# Altium PCB LPEDT_revA1_BikeIt.PcbDoc (part 3 of 3)
Units mil, origin at the board's own origin, x right, y up, seen from the top; angles counter-clockwise.
Board outline 2400 x 2400 mil, 2 copper layers (Top Layer, Bottom Layer), stack 61.756 mil thick; 103 components, 74 nets, 422 pads, 0 vias.
Unrouted connection lines stored in the file: 270.
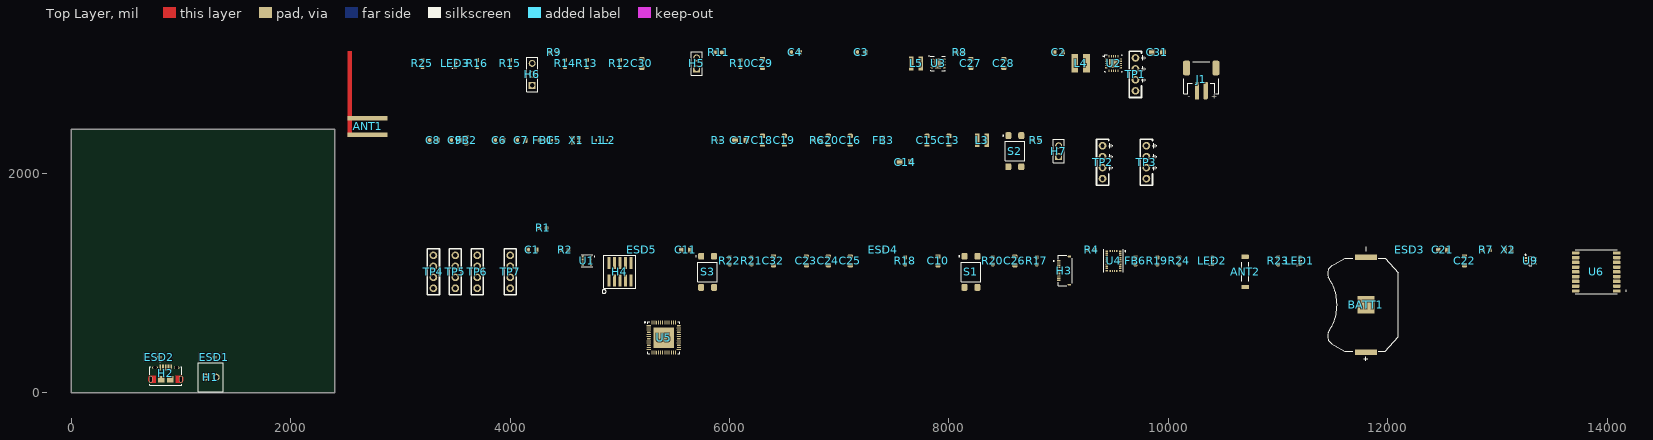
[diagram p0: Top Layer view]

## Part data (continued)
R15: library part CRCW06037M50FKEA, "RES SMD 7.5M 1% 1/10W 0603", Case Code (Imperial)=0603, Case Code (Metric)=1608, Manufacturer=Vishay, Max Operating Temperature=155°C, Max Power Dissipation=100mW, Min Operating Temperature=-55°C, Package Quantity=10, Resistance=7.5MR, Resistance Tolerance=1%, Resistor Type="Thick Film", Supplier Part Number 1=541-7.50MHCT-ND, Temperature Coefficient=100ppm/°C, Voltage Rating=75V, Case/Package=0603, Category="Chip SMD Resistors", ComponentLink1Description=https://datasheet.ciiva.com/2494/dcrcwe3-2494736.pdf?src-supplier=Digi-Key, ComponentLink1URL=https://datasheet.ciiva.com/2494/dcrcwe3-2494736.pdf?src-supplier=Digi-Key, ComponentLink2Description=https://datasheet.ciiva.com/2494/dcrcwe3-2494737.pdf?src-supplier=Digi-Key, ComponentLink2URL=https://datasheet.ciiva.com/2494/dcrcwe3-2494737.pdf?src-supplier=Digi-Key, ComponentLink3Description=https://datasheet.ciiva.com/5552/dcrcwe3-109170-5552646.pdf?src-supplier=Mouser, ComponentLink3URL=https://datasheet.ciiva.com/5552/dcrcwe3-109170-5552646.pdf?src-supplier=Mouser, ComponentLink4Description=https://datasheet.ciiva.com/22869/70201119-22869559.pdf?src-supplier=Allied+Electronics, ComponentLink4URL=https://datasheet.ciiva.com/22869/70201119-22869559.pdf?src-supplier=Allied+Electronics, ComponentLink5Description=https://datasheet.ciiva.com/16784/70201119-16784828.pdf?src-supplier=Allied+Electronics, ComponentLink5URL=https://datasheet.ciiva.com/16784/70201119-16784828.pdf?src-supplier=Allied+Electronics, ComponentLink6Description=https://datasheet.ciiva.com/2494/dcrcwe3-2494735.pdf?src-supplier=Digi-Key, ComponentLink6URL=https://datasheet.ciiva.com/2494/dcrcwe3-2494735.pdf?src-supplier=Digi-Key, ComponentLink7Description=https://datasheet.ciiva.com/22704/1697337-22704015.pdf?src-supplier=Element14, ComponentLink7URL=https://datasheet.ciiva.com/22704/1697337-22704015.pdf?src-supplier=Element14, Construction=Rectangular, Contact Plating=Tin, Depth=0.85mm, Features="Automotive AEC-Q200", Height=0.45mm, Lead Free="Lead Free", Length=1.55mm, Manufacturer Part Number=CRCW06037M50FKEA, Military Standard=Not, Number of Pins=2, Number of Terminations=2, Packaging="Tape and Reel", Power Rating=100mW, Pricing 1="1=0.10000, 10=0.03400, 100=0.01390, 1000=0.00624, 2500=0.00542 (USD)", REACH SVHC=Unknown, RoHS=Yes, RoHS Compliant=Yes, Series=CRCW, Stock 1=25524, Supplier 1=Digi-Key, Technology="THICK FILM", Termination=Solder, Tolerance=1%, Voltage Rating (DC)=75V, Weight=7.1E-05oz, Width=0.033inch
R16: library part CRCW06035M62FKEA, "RES SMD 5.62M 1% 1/10W 0603", Case Code (Imperial)=0603, Case Code (Metric)=1608, Manufacturer=Vishay, Max Operating Temperature=155°C, Max Power Dissipation=100mW, Min Operating Temperature=-55°C, Package Quantity=10, Resistance=5.62MR, Resistance Tolerance=1%, Resistor Type="Thick Film", Supplier Part Number 1=541-5.62MHCT-ND, Temperature Coefficient=100ppm/°C, Voltage Rating=75V, Case/Package=0603, Category="Chip SMD Resistors", ComponentLink1Description=https://datasheet.ciiva.com/2525/dcrcwe3-2525254.pdf?src-supplier=Digi-Key, ComponentLink1URL=https://datasheet.ciiva.com/2525/dcrcwe3-2525254.pdf?src-supplier=Digi-Key, ComponentLink2Description=https://datasheet.ciiva.com/2525/dcrcwe3-2525255.pdf?src-supplier=Digi-Key, ComponentLink2URL=https://datasheet.ciiva.com/2525/dcrcwe3-2525255.pdf?src-supplier=Digi-Key, ComponentLink3Description=https://datasheet.ciiva.com/7748/1697337-7748679.pdf?src-supplier=Element14, ComponentLink3URL=https://datasheet.ciiva.com/7748/1697337-7748679.pdf?src-supplier=Element14, ComponentLink4Description=https://datasheet.ciiva.com/2525/dcrcwe3-2525256.pdf?src-supplier=Digi-Key, ComponentLink4URL=https://datasheet.ciiva.com/2525/dcrcwe3-2525256.pdf?src-supplier=Digi-Key, ComponentLink5Description=https://datasheet.ciiva.com/7748/1697337-7748680.pdf?src-supplier=Element14, ComponentLink5URL=https://datasheet.ciiva.com/7748/1697337-7748680.pdf?src-supplier=Element14, ComponentLink6Description=https://datasheet.ciiva.com/5546/dcrcwe3-109170-5546746.pdf?src-supplier=Mouser, ComponentLink6URL=https://datasheet.ciiva.com/5546/dcrcwe3-109170-5546746.pdf?src-supplier=Mouser, ComponentLink7Description=https://datasheet.ciiva.com/9065/dcrcwe3-9065258.pdf?src-supplier=Avnet, ComponentLink7URL=https://datasheet.ciiva.com/9065/dcrcwe3-9065258.pdf?src-supplier=Avnet, ComponentLink8Description=https://datasheet.ciiva.com/22700/1697337-22700634.pdf?src-supplier=Element14, ComponentLink8URL=https://datasheet.ciiva.com/22700/1697337-22700634.pdf?src-supplier=Element14, ComponentLink9Description=https://datasheet.ciiva.com/22675/1700796-22675468.pdf?src-supplier=Element14, ComponentLink9URL=https://datasheet.ciiva.com/22675/1700796-22675468.pdf?src-supplier=Element14, ComponentLink10Description=https://datasheet.ciiva.com/22675/1700796-22675469.pdf?src-supplier=Element14, ComponentLink10URL=https://datasheet.ciiva.com/22675/1700796-22675469.pdf?src-supplier=Element14, Construction=Rectangular, Contact Plating=Tin, Depth=0.85mm, Features="Automotive AEC-Q200", Height=0.02inch, Lead Free="Lead Free", Length=1.55mm, Manufacturer Part Number=CRCW06035M62FKEA, Military Standard=Not, Number of Pins=2, Number of Terminations=2, Packaging="Tape and Reel", Power Rating=100mW, Pricing 1="1=0.10000, 10=0.03400, 100=0.01390, 1000=0.00624, 2500=0.00542 (USD)", REACH SVHC=Unknown, RoHS=Yes, RoHS Compliant=Yes, Series=CRCW, Stock 1=31807, Supplier 1=Digi-Key, Tolerance=1%, Voltage Rating (DC)=75V, Weight=7.1E-05oz, Width=0.033inch
S1 S2 S3: library part TL3305AF260QG, "SWITCH TACTILE SPST-NO 50MA 12V", Manufacturer=E-Switch, Max Operating Temperature=70°C, Min Operating Temperature=-20°C, Operating Force=260gf, Supplier Part Number 1=EG5353CT-ND, Actuator Type=Standard, Category="Tactile Switches", ComponentLink1Description=http://www.farnell.com/datasheets/2554191.pdf?src-supplier=Farnell, ComponentLink1URL=http://www.farnell.com/datasheets/2554191.pdf?src-supplier=Farnell, ComponentLink2Description=http://www.farnell.com/datasheets/2554191.pdf?src-supplier=Newark, ComponentLink2URL=http://www.farnell.com/datasheets/2554191.pdf?src-supplier=Newark, ComponentLink3Description=http://www.farnell.com/datasheets/2554191.pdf?src-supplier=Element14, ComponentLink3URL=http://www.farnell.com/datasheets/2554191.pdf?src-supplier=Element14, ComponentLink4Description=http://spec_sheets.e-switch.com/specs/P010471.pdf?src-supplier=Digi-Key, ComponentLink4URL=http://spec_sheets.e-switch.com/specs/P010471.pdf?src-supplier=Digi-Key, ComponentLink5Description=http://spec_sheets.e-switch.com/specs/P010471.pdf?src-supplier=Mouser, ComponentLink5URL=http://spec_sheets.e-switch.com/specs/P010471.pdf?src-supplier=Mouser, ComponentLink6Description=http://spec_sheets.e-switch.com/specs/P010471.pdf?src-supplier=NAC+Semi, ComponentLink6URL=http://spec_sheets.e-switch.com/specs/P010471.pdf?src-supplier=NAC+Semi, Illumination Type=Non-Illuminated, Lead Free="Lead Free", Manufacturer Part Number=TL3305AF260QG, Mechanical Life=200000Cycles, Mount="Surface Mount", Packaging="Tape and Reel", Pricing 1="1=0.18000, 10=0.17700, 25=0.16760, 100=0.15250, 250=0.14336, 500=0.13116, 1000=0.10980 (USD)", RoHS=No, Stock 1=70002, Supplier 1=Digi-Key, Switch Function=Off-Mom, Switch Travel=0.2mm, Termination="Gull Wing", Throw Configuration=SPST
TP1 TP2 TP3: library part "Test Point"
TP4 TP5 TP6 TP7: library part TP_10x_Floating, "Test Point 300 mil centers"
U1: "Humidity Temperature Sensor 0 ~ 100% RH I²C, SPI ±3% 1s Surface Mount", Package="LGA-8 Bosch", Supplier Part Number 1=828-1063-1-ND, Availability=Unavailable, MF=Bosch, MP=BME280, Price=None, SnapEDA_Link=https://www.snapeda.com/parts/BME280/Bosch%20Sensortec/view-part/49769/?ref=snap, Supplier 1=Digi-Key
U2: library part BQ25570RGRR, "Battery Management Low Pwr Harvester Pwr Mgmt IC", Alternate_PartNumber=BQ25570RGRT, Case/Package=VQFN, Manufacturer="Texas Instruments", Max Operating Temperature=125°C, Min Operating Temperature=-40°C, Operating Supply Current=488nA, Operating Supply Voltage=4V, Output Current=100mA, Package Quantity=3000, Supplier Part Number 1=296-39934-1-ND, Switching Frequency=1MHz, Category="Battery Management", ComponentLink1Description=https://datasheet.ciiva.com/29590/bq25570-29590060.pdf?src-supplier=Digi-Key, ComponentLink1URL=https://datasheet.ciiva.com/29590/bq25570-29590060.pdf?src-supplier=Digi-Key, CompType=IC, Contact Plating=Gold, Copyright="Copyright (C) 2018 Accelerated Designs. All rights reserved", Lead Free="Lead Free", Manufacturer Part Number=BQ25570RGRR, Mount="Surface Mount", MountType=SMT, Number of Pins=20, PackageReference=RGR0020A, Packaging="Tape and Reel", PartNumber=BQ25570RGRR, PIN_COUNT=21, Pricing 1="1=7.10000, 10=6.41800, 25=6.11920, 100=5.07440, 250=4.62668, 500=4.32820, 1000=3.94240 (USD)", RefDes=RefDes, RoHS=Y, RoHS Compliant=Yes, Stock 1=3521, Supplier 1=Digi-Key, Type=DEV
U3: library part TPS2115ADRBT, "OR Controller Source Selector Switch N-Channel 2:1 8-SON (3x3)", Case/Package=SON, Current - Output 2=1.25A, Manufacturer="Texas Instruments", Max Input Voltage=5.5V, Max Operating Temperature=85°C, Max Power Dissipation=2.5W, Max Supply Current=90uA, Min Input Voltage=2.8V, Min Operating Temperature=-40°C, Nominal Supply Current=55uA, On-State Resistance=110mR, Package Quantity=250, Supplier Part Number 1=296-39358-1-ND, Category="Power Management ICs", ComponentLink1Description=https://datasheet.ciiva.com/15109/getdatasheetpartid-445171-15109276.pdf?src-supplier=Verical, ComponentLink1URL=https://datasheet.ciiva.com/15109/getdatasheetpartid-445171-15109276.pdf?src-supplier=Verical, ComponentLink2Description=https://datasheet.ciiva.com/1961/tps2115a-1961013.pdf?src-supplier=Digi-Key, ComponentLink2URL=https://datasheet.ciiva.com/1961/tps2115a-1961013.pdf?src-supplier=Digi-Key, ComponentLink3Description=https://datasheet.ciiva.com/3232/tps2115a-3232473.pdf?src-supplier=Avnet, ComponentLink3URL=https://datasheet.ciiva.com/3232/tps2115a-3232473.pdf?src-supplier=Avnet, ComponentLink4Description=https://datasheet.ciiva.com/25905/sbvs044f-25905737.pdf?src-supplier=Avnet+Europe, ComponentLink4URL=https://datasheet.ciiva.com/25905/sbvs044f-25905737.pdf?src-supplier=Avnet+Europe, ComponentLink5Description=https://datasheet.ciiva.com/3232/tps2115a-3232538.pdf?src-supplier=Avnet, ComponentLink5URL=https://datasheet.ciiva.com/3232/tps2115a-3232538.pdf?src-supplier=Avnet, ComponentLink6Description=https://datasheet.ciiva.com/28652/1862467-28652426.pdf?src-supplier=Element14, ComponentLink6URL=https://datasheet.ciiva.com/28652/1862467-28652426.pdf?src-supplier=Element14, Lead Free="Lead Free", Manufacturer Part Number=TPS2115ADRBT, Max Output Current=1.25A, Number of Inputs=2, Number of Outputs=1, Number of Pins=8, Number of Switches=1, Operating Supply Current=55uA, Operating Supply Voltage=5.5V, Output Current=1.25A, Packaging="Tape and Reel", Pricing 1="1=2.44000, 10=2.18800, 25=2.06440, 100=1.65150 (USD)", Radiation Hardening=No, REACH SVHC="No SVHC", RoHS=Yes, RoHS Compliant=Yes, Series=-, Stock 1=1983, Supplier 1=Digi-Key, Supply Current=55uA, Turn-Off Delay Time=5ms, Turn-On Delay Time=1ms, Weight=0.000847oz
U4: "IMU ACCEL/GYRO/MAG I2C 28LGA / CMP-2000-05075-4", Case/Package=LGA, Max Operating Temperature=85°C, Min Operating Temperature=-40°C, Lead Free="Lead Free", Mount="Surface Mount", Output Type=I2C, Packaging="Tape and Reel", Sensor Type=Accelerometer
U5: "BLUE GECKO QFN48 2.4 GHZ 512KB 6", Manufacturer="Silicon Labs", Supplier Part Number 1=336-4109-ND, Category="RF Receivers, Transceivers", ComponentLink1Description=http://www.farnell.com/datasheets/2813683.pdf?src-supplier=Farnell, ComponentLink1URL=http://www.farnell.com/datasheets/2813683.pdf?src-supplier=Farnell, Manufacturer Part Number=EFR32BG13P732F512GM48-C, Pricing 1="1=7.61000, 10=6.79200, 25=6.11320, 80=5.56988, 230=5.02643, 440=4.51023, 945=3.80380 (USD)", RoHS=No, Supplier 1=Digi-Key
U6: "MAX-M8 RF Receiver BeiDou, Galileo, GLONASS, GNSS, GPS 1.575GHz -167dBm", Package="SMD-18 u-blox", Supplier Part Number 1=672-MAX-M8Q-0TR-ND, Availability=Warning, Check_prices=https://www.snapeda.com/parts/MAX-M8Q-0/U-Blox%20America%20Inc./view-part/563405/?ref=eda, MF="U-Blox America", MP=MAX-M8Q-0, Price=None, Purchase-URL=https://pricing.snapeda.com/search/part/MAX-M8Q-0/?ref=eda, SnapEDA_Link=https://www.snapeda.com/parts/MAX-M8Q-0/U-Blox%20America%20Inc./view-part/563405/?ref=snap, Supplier 1=Digi-Key
U9: library part TPS22919DCKR, "5.5-V, 1.5-A, 90-mΩ load switch with adj. output discharge 6-SC70 -40 to 105", Manufacturer="Texas Instruments", Supplier Part Number 1=296-TPS22919DCKRCT-ND, Manufacturer Part Number=TPS22919DCKR, Pricing 1="1=0.39000, 10=0.29100, 25=0.26240, 100=0.14310, 250=0.13832, 500=0.12402, 1000=0.09540 (USD)", RoHS=Yes, RoHS Compliant=Yes, Stock 1=68518, Supplier 1=Digi-Key
X1: library part CX2016DB38400D0FLJCC, "CRYSTAL 38.4000MHZ 8PF SMD", Case/Package=SMD/SMT, ESR (Equivalent Series Resistance)=60R, Frequency=38.4MHz, Frequency Stability=15ppm, Frequency Tolerance=10ppm, Load Capacitance=8pF, Manufacturer="Kyocera AVX", Max Operating Temperature=85°C, Min Operating Temperature=-30°C, Package Quantity=3000, Supplier Part Number 1=1253-1119-1-ND, Category=Crystals, ComponentLink1Description=https://datasheet.ciiva.com/26992/cx2016db-cs-e-26992341.pdf?src-supplier=Mouser, ComponentLink1URL=https://datasheet.ciiva.com/26992/cx2016db-cs-e-26992341.pdf?src-supplier=Mouser, ComponentLink2Description=https://datasheet.ciiva.com/29631/cx2016db-wl-e-29631639.pdf?src-supplier=Digi-Key, ComponentLink2URL=https://datasheet.ciiva.com/29631/cx2016db-wl-e-29631639.pdf?src-supplier=Digi-Key, ComponentLink3Description=https://datasheet.ciiva.com/29631/cx2016db-wl-e-29631640.pdf?src-supplier=Digi-Key, ComponentLink3URL=https://datasheet.ciiva.com/29631/cx2016db-wl-e-29631640.pdf?src-supplier=Digi-Key, ComponentLink4Description=https://datasheet.ciiva.com/29631/cx2016db-wl-e-29631641.pdf?src-supplier=Digi-Key, ComponentLink4URL=https://datasheet.ciiva.com/29631/cx2016db-wl-e-29631641.pdf?src-supplier=Digi-Key, Height=0.018inch, Lead Pitch=1.4mm, Length=0.079inch, Manufacturer Part Number=CX2016DB38400D0FLJCC, Mount="Surface Mount", Packaging="Tape and Reel", Pricing 1="1=0.65000, 10=0.57500, 50=0.53760, 100=0.47500, 500=0.45000, 1000=0.37500 (USD)", RoHS=Yes, Stock 1=63853, Supplier 1=Digi-Key, Termination=SMD/SMT, Tolerance=10ppm, Width=1.6mm
X2: library part CM8V-T1A-32.768KHZ-12.5PF-20PPM-TB-QA, "32.768kHz ±20ppm Crystal 12.5pF 70 kOhms 2-SMD, No Lead", Manufacturer="Micro Crystal", Supplier Part Number 1=2195-CM8V-T1A-32.768KHZ-12.5PF-20PPM-TB-QACT-ND, Manufacturer Part Number=CM8V-T1A-32.768KHZ-12.5PF-20PPM-TB-QA, Pricing 1="1=0.77000, 10=0.63800, 50=0.57400, 100=0.51030, 500=0.48478 (USD)", RoHS=No, Stock 1=2694, Supplier 1=Digi-Key

## Nets (pads, with @x,y where several pads share a name; then routed paths per layer and width w, separated by ;. In a path a pad name is that pad's centre, name@x,y a point inside that pad or via, vN(x,y) a via of type N, cw(c..) or ccw(c..) an arc to the next point about the centre after c; other vN are vias at no path point)
+3V3_GPS: C22.1 R7.2 U6.7 U6.8 U9.6
+3V3_LOAD: C1.1 C14.1 C15.1 C20.1 C21.1 C24.1 C26.1 FB3.1 FB6.1 H3.7 H4.1 H7.2 LED2.A R1.2 R2.1 R4.2 R17.1 R18.1 R19.2 R21.2 TP3.1 U1.2 U1.6 U1.8 U4.3 U4.28 U5.39 U5.42 U9.1
+3V3_VDCDC_OUT: C13.1 C16.1 FB1.1 L3.2 R3.2 TP2.1 U5.40
+3V3_VOUT: C29.1 H7.1 L5.2 U2.14
+3V7_BATT: C31.1 J1.2 U2.18
+3V_GPS: BATT1.2 ESD3.1 U6.6
+5V_IN: C4.1 ESD2.1 H2.1 U3.6
+V_PMIC_IN: C2.1 L4.1 R8.2 U2.2 U3.7
+V_SOLAR_IN: C3.1 ESD1.1 H1.2 U3.8
AVDD: C17.1 C18.1 R6.2 U5.34
D0: H5.1 U3.2
D1: H6.2 U3.3
DBG_LED: R24.1 U5.6
DECOUPLE: C19.1 U5.41
DISP: C23.1 H3.5 U5.20
DISP_VDDA: C25.1 FB6.2 H3.6
EXTCOMIN: H3.4 U5.46
EXTINT_GPS: U5.33 U6.5
EXTINT_IMU: U4.14 U5.22
EXTMODE: H3.8 U5.19
GND: ANT1.GND BATT1.1 C1.2 C2.2 C3.2 C4.2 C5.2 C6.2 C7.2 C8.2 C9.2 C10.2 C11.2 C13.2 C14.2 C15.2 C16.2 C17.2 C18.2 C19.2 C20.2 C21.2 C22.2 C23.2 C24.2 C25.2 C26.2 C27.2 C28.2 C29.2 C30.2 C31.2 C32.2 ESD1.2 ESD2.2 ESD3.2 ESD4.2 ESD5.2 H1.1 H2.5 H2.S1 H2.S2 H2.S3 H2.S4 H2.S5 H2.S6 H3.9 H3.10 H3.S1 H3.S2 H4.2 H5.2 H6.3 J1.1 R9.1 R10.2 R12.2 R15.2 R23.2 R25.1 S1.3 S1.4 S2.3 S2.4 S3.3 S3.4 TP1.2 TP2.2 TP3.2 TP4.2 TP4.4 TP5.2 TP5.4 TP6.4 TP7.2 TP7.4 U1.1 U1.5 U1.7 U2.1 U2.5 U2.15 U2.21 U3.5 U4.2 U4.5 U4.6 U4.25 U5.0 U5.14 U5.15 U5.16 U5.37 U6.1 U6.10 U6.12 U9.2 X1.2 X1.4
GPS_ON: U5.31 U9.3
HFXTAL_N: U5.10 X1.3
HFXTAL_P: U5.11 X1.1
LBUCK: L5.1 U2.16
LFXTAL_N: U5.35 X2.2
LFXTAL_P: U5.36 X2.1
n_BOOT_LOAD_PIN: R19.1 U4.4
NetANT1_FEED: ANT1.FEED L2.2
NetANT2_1: ANT2.1 U6.11
NetC5_1: C5.1 L1.2 L2.1
NetC32_1: C32.1 U4.9 U4.17 U4.18
NetESD4_1: ESD4.1 R20.2 S1.1 S1.2
NetESD5_1: ESD5.1 R22.2 S3.1 S3.2
NetFB3_2: FB3.2 R6.1
NetL1_1: L1.1 U5.17
NetL4_2: L4.2 U2.20
NetLED1_A: LED1.A U6.4
NetLED1_C: LED1.C R23.1
NetLED2_C: LED2.C R24.2
NetLED3_C: LED3.C R25.2
NetR5_1: R5.1 S2.1 S2.2
NetR7_1: R7.1 U9.5
NetR9_2: R9.2 U3.4
OK_HYST: R13.1 R14.2 U2.10
OK_PROG: R12.1 R13.2 U2.11
PAVDD: C8.1 C9.1 FB2.1 FB2.2 R3.1 U5.18
PMUX_D1: H6.1 U5.30
PMUX_STAT: R8.1 TP1.1 U3.1
RESET_GPS: U5.32 U6.9
RESET_IMU: U4.11 U5.21
RESETn: H4.3 R5.2 U5.12
RFVDD: C6.1 C7.1 FB1.2 U5.9
SCL_BME: R2.2 TP4.3 U1.4 U5.28
SCL_BNO: R18.2 TP7.3 U4.19 U5.48
SDA_BME: R1.1 TP4.1 U1.3 U5.27
SDA_BNO: R17.2 TP7.1 U4.20 U5.47
SPI_CS: H3.3 TP6.1 U5.44
SPI_SCK: H3.1 TP6.3 U5.43
SPI_SDI: H3.2 TP6.2 U5.45
SWCLK: H4.8 U5.1
SWDIO: H4.7 U5.2
SWO: H4.6 U5.3
"UART_ TXO": TP5.1 U5.25 U6.2
UART_RXI: TP5.3 U5.26 U6.3
UI_PB0: C10.1 R4.1 R20.1 U5.7
UI_PB1: C11.1 R21.1 R22.1 U5.8
VBAT_OK: LED3.A U2.13
VBAT_OV: R15.1 R16.2 U2.7
VOUT_SET: R10.1 R11.2 U2.12
VRDIV: R11.1 R14.1 R16.1 U2.8
VREF_SAMP: C30.1 U2.4
VREGSW: L3.1 U5.38
VSTOR: C27.1 C28.1 U2.3 U2.6 U2.19
pads on no net: ANT2.2 H2.2 H2.3 H2.4 H4.4 H4.5 H4.9 H4.10 J1.NC1 J1.NC2 U2. U2.9 U2.17 U3.9 U4.1 U4.7 U4.8 U4.10 U4.12 U4.13 U4.15 U4.16 U4.21 U4.22 U4.23 U4.24 U4.26 U4.27 U5.4 U5.5 U5.13 U5.23 U5.24 U5.29 U6. U6.13 U6.14 U6.15 U6.16 U6.17 U6.18 U9.4

## Text inside footprints (layer, text, board x,y; h text height)
H2: Mechanical 13 "PCB END" at 783.23,38.32 h19.68
J1: Top Overlay "-" at 10175,2655 h86.8; Top Overlay "+" at 10389.93,2658.46 h86.8